# Altium PCB Main.PcbDoc
Units mil, origin at the board's own origin, x right, y up, seen from the top; angles counter-clockwise.
Board outline 670 x 1280 mil, 2 copper layers (Top Layer, Bottom Layer); 20 components, 14 nets, 71 pads, 10 vias.
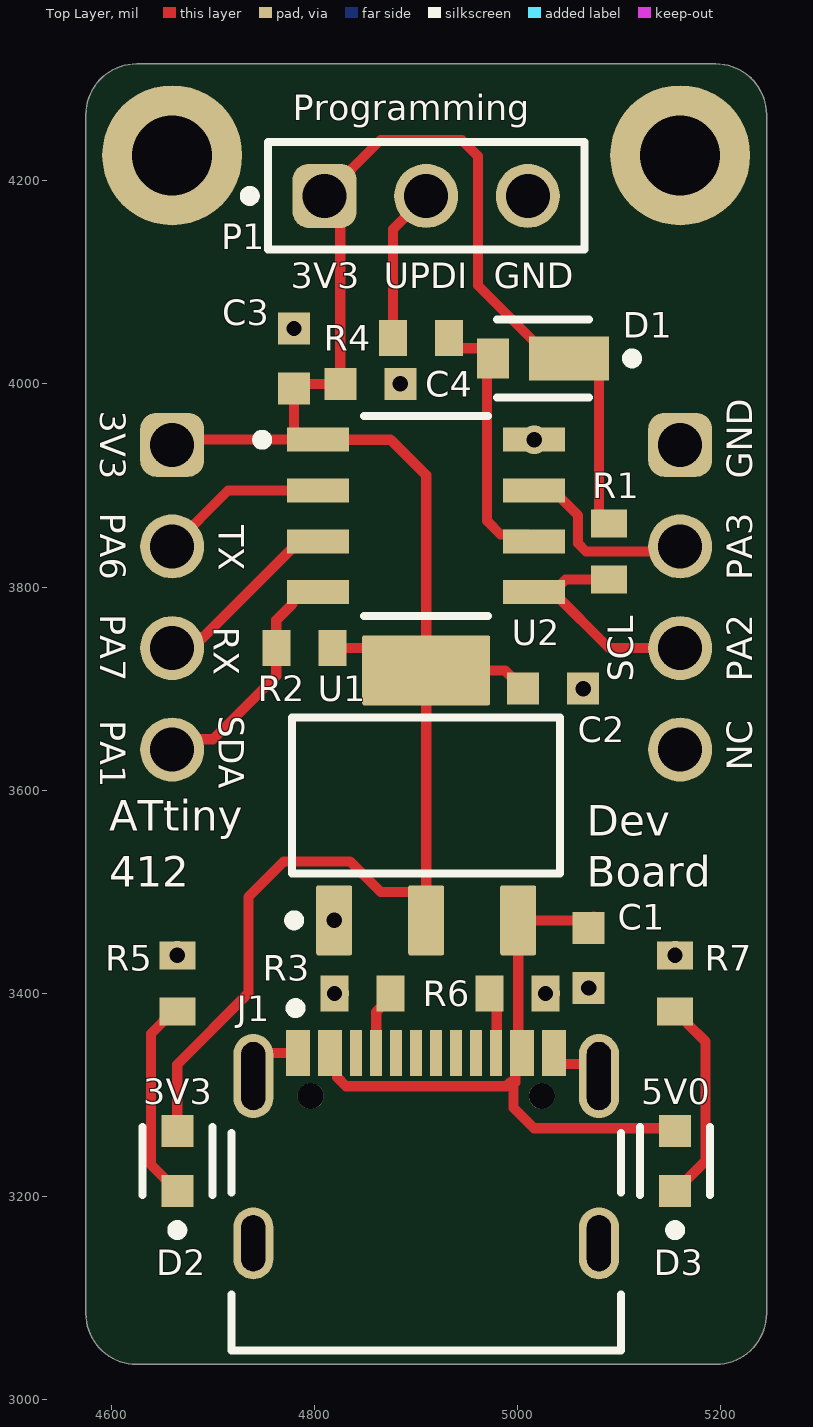
[diagram p0: Top Layer view]
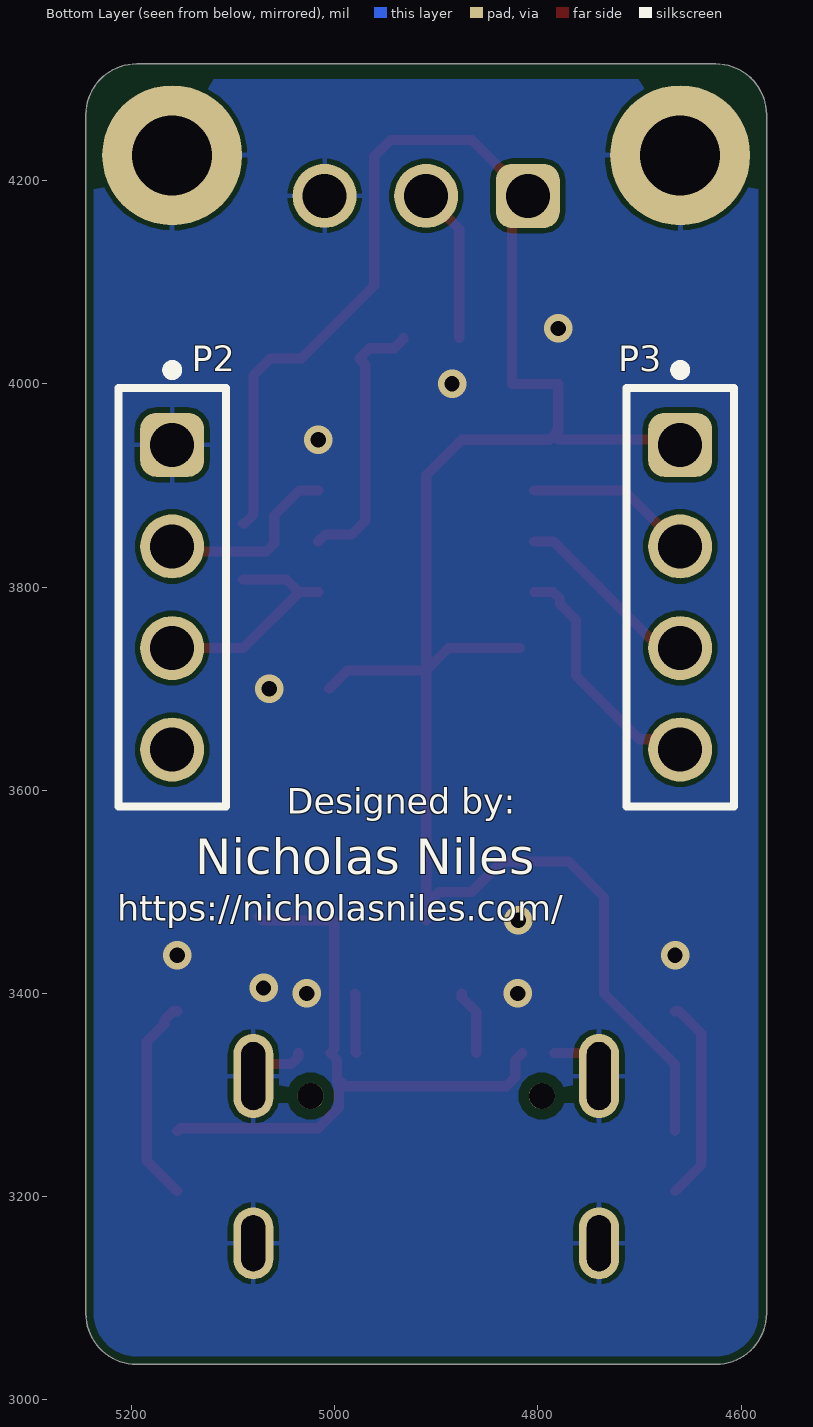
[diagram p1: Bottom Layer view, seen from below]
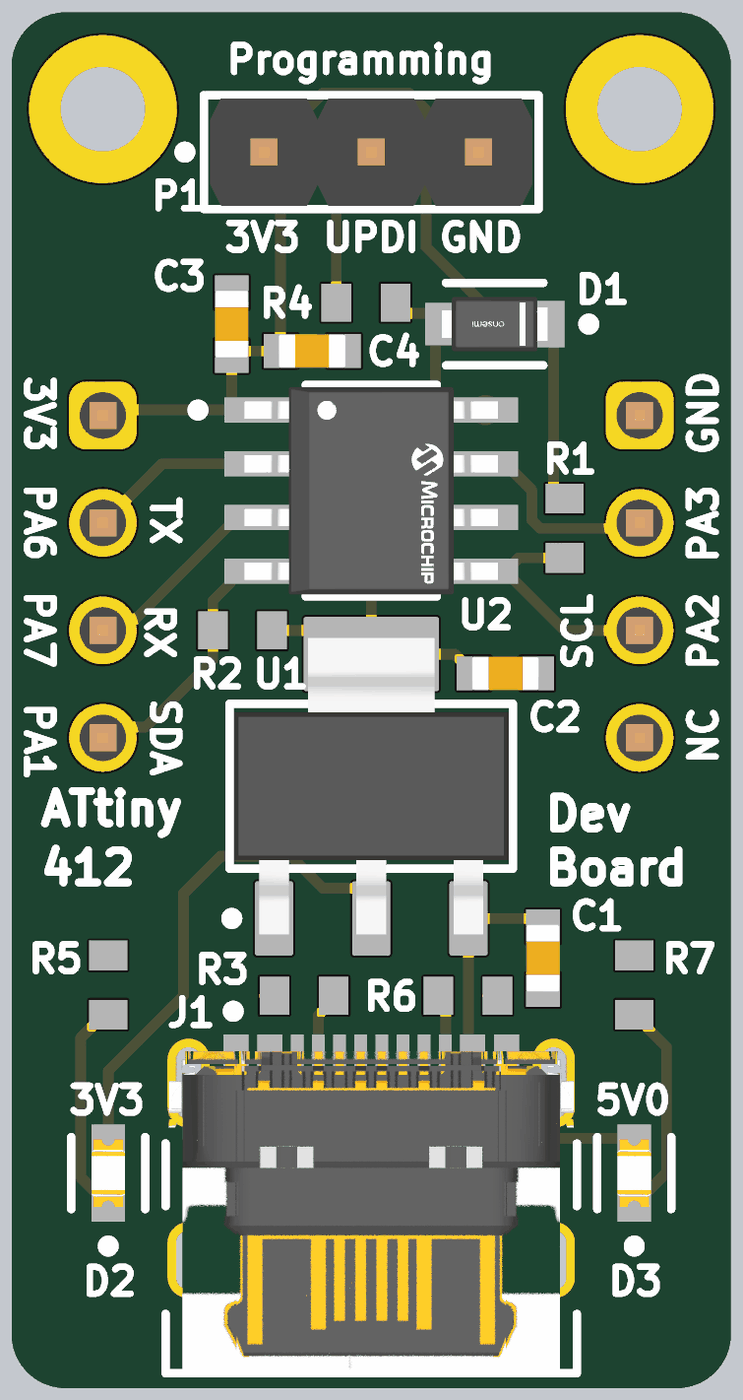
[diagram p2: 3D render of the assembled board from above, using the file's embedded part models]

## Layer stack, top to bottom
Top Solder: solder mask 0.4, Solder Resist, Dk 3.5
Top Layer: signal copper 1.4
Dielectric 1: dielectric 12.6, FR-4, Dk 4.8
Bottom Layer: signal copper 1.4
Bottom Solder: solder mask 0.4, Solder Resist, Dk 3.5

## Board outline
4575,3085 4575,4265 cw(c4625,4265) 4625,4315 5195,4315 cw(c5195,4265) 5245,4265 5245,3085 cw(c5195,3085) 5195,3035 4625,3035 cw(c4625,3085)

## Design rules (kind name [scope] priority, off if disabled: settings)
BoardOutlineClearance [All] p1: gap=7.87 ignorepadtopadclearanceinfootprint=FALSE
Clearance [All] p1: gap=5 ignorepadtopadclearanceinfootprint=TRUE except(10: Arc-Hole Track-Hole SMDPad-Hole THPad-Hole Via-Hole Fill-Hole Poly-Hole Region-Hole Text-Hole)
ComponentClearance [All] p1: gap=5 collisioncheckmode=3 verticalgap=5 showdistances=TRUE
DiffPairsRouting [All] p1: maxlimit=10 minlimit=5 mostfreqgap=5 toplayer_minwidth=5 toplayer_maxwidth=1000 toplayer_prefwidth=5 bottomlayer_minwidth=5 bottomlayer_maxwidth=1000 bottomlayer_prefwidth=5 maxuncoupledlength=500
Height [All] p1: minheight=0 maxheight=71497.94 prefheight=500
HoleSize [All] p1: absolutevalues=TRUE maxlimit=248.03 minlimit=11.81 maxpercent=80.000 minpercent=20.000
HoleToHoleClearance [All] p1: gap=10 allowstackedmicrovias=FALSE
MinimumAnnularRing [All] p1: minimumring=6
MinimumSolderMaskSliver [All] p1: minsoldermaskwidth=6
PlaneClearance [All] p1: clearance=5
PlaneConnect PlaneConnectPowerPads [InPadClass('PowerPads')] p1: planeconnectstyle=Direct reliefexpansion=20 reliefentries=4 reliefconductorwidth=10 reliefairgap=10
PlaneConnect [All] p2: pad.planeconnectstyle=Relief pad.reliefexpansion=11.81 pad.reliefentries=4 pad.reliefconductorwidth=5 pad.reliefairgap=5 via.planeconnectstyle=Direct via.reliefexpansion=11.81 via.reliefentries=4 via.reliefconductorwidth=5 via.reliefairgap=5
PolygonConnect PolygonConnectPowerPads [All vs (InPadClass('PowerPads'))] p1: connectstyle=Direct reliefconductorwidth=10 reliefentries=4 polygonreliefangle="90 Angle" airgapwidth=10
PolygonConnect [All] p2: thpad.connectstyle=Relief thpad.reliefconductorwidth=5 thpad.reliefentries=4 thpad.polygonreliefangle="90 Angle" thpad.airgapwidth=5 smdpad.connectstyle=Relief smdpad.reliefconductorwidth=5 smdpad.reliefentries=4 smdpad.polygonreliefangle="90 Angle" smdpad.airgapwidth=5 via.connectstyle=Direct via.reliefconductorwidth=5 via.reliefentries=4 via.polygonreliefangle="90 Angle" via.airgapwidth=5
RoutingVias [All] p1: holewidth=11.81 width=23.62 viastyle="Through Hole" minholewidth=11.81 minwidth=23.62 maxholewidth=23.62 maxwidth=259.84
SilkToSilkClearance [All] p1: silktosilkclearance=5
SilkToSolderMaskClearance [IsPad] p1: minsilkscreentomaskgap=5 clearancetoexposedcopper=TRUE
SolderMaskExpansion [All] p1: expansion=2 istentingtop=FALSE
SupplyNets "Schematic Supply Nets" [InNet('GND')] p1: voltage=0.000
SupplyNets "Schematic Supply Nets_3" [InNet('3V3')] p2: voltage=0.000
SupplyNets "Schematic Supply Nets_1" [InNet('5V0')] p3: voltage=0.000
UnRoutedNet [All] p1: checkbadconnections=TRUE
Width Width_10mil [All] p1: maxlimit=1000 minlimit=10 preferedwidth=10 minimp=50.000000 maximp=50.000000 favimp=50.000000
Width Width_6mil [All] p2: maxlimit=1000 minlimit=6 preferedwidth=6 minimp=50.000000 maximp=50.000000 favimp=50.000000
Width Power_20mil [All] p3: maxlimit=1000 minlimit=20 preferedwidth=20 minimp=50.000000 maximp=50.000000 favimp=50.000000
Width Power_12mil [All] p4: maxlimit=1000 minlimit=12 preferedwidth=12 minimp=50.000000 maximp=50.000000 favimp=50.000000
Width Width_5mil [All] p5: maxlimit=1000 minlimit=5 preferedwidth=5 minimp=50.000000 maximp=50.000000 favimp=50.000000
19 further rules are at their usual default settings.

## Components (designator, comment, footprint, x,y, rotation, side; value= is the part's Value field where it differs from the comment)
C1 "1uF" WCAP-CSGP_0603_L1.6W0.8H0.8_Reflow 5070,3435 r90 top
C2 "1uF" WCAP-CSGP_0603_L1.6W0.8H0.8_Reflow 5035,3700 r180 top
C3 "10uF" WCAP-CSGP_0603_L1.6W0.8H0.8_Reflow 4780,4025 r270 top
C4 "1uF" WCAP-CSGP_0603_L1.6W0.8H0.8_Reflow 4855,4000 r180 top
D1 "NRVBSS14HE" FP-477AD-MFG 5025,4025 r180 top
D2 "LTST-C190KGKT" FP-LTST-C190KGKT-MFG 4665,3235 r90 top
D3 "LTST-C190KGKT" FP-LTST-C190KGKT-MFG 5155,3235 r90 top
J1 "USB4105-GF-A" FP-USB4105-GF-A-MFG 4910,3200 r0 top locked
P1 "61300311121" 61300311121 4910,4185 r0 top locked
P2 "61300411121" 61300411121 5160,3790 r270 bottom locked
P3 "61300411121" 61300411121 4660,3790 r270 bottom locked
R1 "4.7K" RESC1608X55X25NL10T15 5090,3835 r270 top
R2 "4.7K" RESC1608X55X25NL10T15 4790,3740 r180 top
R3 "5.1k" RESC1608X55X25NL10T15 4847.44,3400 r0 top
R4 "1k" RESC1608X55X25NL10T15 4905,4045 r0 top
R5 "1kΩ" RESC1608X55X25NL10T15 4665,3410 r270 top
R6 "5.1k" RESC1608X55X25NL10T15 5000,3400 r180 top
R7 "2.2k" RESC1608X55X25NL10T15 5155,3410 r270 top
U1 "TLV1117LV33DCYR" DCY0004A_N 4910,3595 r90 top locked
U2 "ATTINY412-SSNR" FP-C04-057-SN-MFG 4910,3870 r0 top locked

## Footprints (in the part's own frame and the unit in brackets; to place one, negate y for a bottom-side part, rotate by r counter-clockwise, add the part's x,y. Pads: shape width x height; smd on the part's side, far side on the other; paste and mask are expansions set on the pad)
61300311121 [mm] "Pin Header, pitch 2.54 mm, THT, Vertical, single row, 3p"
  rrect50% 1.6x1.6 hole 1.1: 1(-2.54,0)
  round 1.6 hole 1.1: 2(0,0) 3(2.54,0)
  silkscreen extent -4.53,-1.35 3.96,1.35, body extent -3.81,-1.27 3.81,1.27, height 8.57
61300411121 [mm] "Pin Header, pitch 2.54 mm, THT, Vertical, single row, 4p"
  rrect50% 1.6x1.6 hole 1.1: 1(-3.81,0)
  round 1.6 hole 1.1: 2(-1.27,0) 3(1.27,0) 4(3.81,0)
  silkscreen extent -5.8,-1.35 5.23,1.35, body extent -5.08,-1.27 5.08,1.27, height 8.57
DCY0004A_N [mm] "SOT223, 4-Leads, Body 6.7x3.7mm, Pitch 2.3mm, IPC Medium Density"
  rrect11% 1.75x0.9 smd: 1(-3.125,2.3) 2(-3.125,0) 3(-3.125,-2.3)
  rrect6% 1.75x3.2 smd: 4(3.125,0)
  silkscreen extent -3.25,-3.35 1.95,3.42, body extent -3.5,-3.25 3.5,3.25, height 1.62
FP-477AD-MFG [mm]
  rect 2x1.1 smd paste+0 mask+0: 1(-0.65,0)
  rect 0.8x1 smd paste+0 mask+0: 2(1.25,0)
  silkscreen extent -2.35,-0.97 1.15,0.97, body extent -1.75,-0.8 1.75,0.8, height 0.25
FP-C04-057-SN-MFG [mm]
  rect 1.55x0.6 smd paste+0 mask+0: 1(-2.7,1.905) 2(-2.7,0.635) 3(-2.7,-0.635) 4(-2.7,-1.905) 5(2.7,-1.905) 6(2.7,-0.635) 7(2.7,0.635) 8(2.7,1.905)
  silkscreen extent -4.22,-2.5 1.55,2.5, body extent -3.57,-2.75 3.57,2.75, height 0.25
FP-LTST-C190KGKT-MFG [mm]
  rect 0.8x0.8 smd paste+0 mask+0: 1(-0.75,0) 2(0.75,0)
  silkscreen extent -1.85,-0.87 0.85,0.87, body extent -1.25,-0.55 1.25,0.55, height 0.25
FP-USB4105-GF-A-MFG [mm]
  rrect100% 1x2.1 hole 1.7 slot 0.6 at 0 deg paste-2539.97 mask+0: 1(-4.32,3.015) 2(4.32,3.015)
  rrect100% 1x1.8 hole 1.4 slot 0.6 at 0 deg paste-2539.97 mask+0: 3(-4.32,-1.165) 4(4.32,-1.165)
  rect 0.6x1.15 smd paste+0 mask+0: A1-B12(-3.2,3.59) A4-B9(-2.4,3.59) B1-A12(3.2,3.59) B4-A9(2.4,3.59)
  rect 0.3x1.15 smd paste+0 mask+0: A5(-1.25,3.59) A6(-0.25,3.59) A7(0.25,3.59) A8(1.25,3.59) B5(1.75,3.59) B6(0.75,3.59) B7(-0.75,3.59) B8(-1.75,3.59)
  round 0.65 hole 0.65 unplated paste-2539.97 mask+0: ""(-2.89,2.515) ""(2.89,2.515)
  silkscreen extent -4.86,-3.84 4.86,4.84, body extent -4.96,-3.94 4.96,4.27, height 0.25
RESC1608X55X25NL10T15 [mm] "Chip Resistor, 2-Leads, Body 1.60x0.80mm, IPC Medium Density"
  rect 0.7x0.9 smd: 1(-0.7,0) 2(0.7,0)
  body extent -0.85,-0.45 0.85,0.45, height 0.55
WCAP-CSGP_0603_L1.6W0.8H0.8_Reflow [mm] "Ceramic Capacitors, body 1.6x0.8mm"
  rect 0.8x0.8 smd: 1(-0.75,0) 2(0.75,0)
  body extent -0.8,-0.4 0.8,0.4, height 0.8

## Part data
C1 C2 C3 C4: library part CMP-207839-000060-3, "10V tolerance"
D1: library part CMP-00278-93203856-2, "NRVBSS14HE Rectifier Diode, Schottky, 1 Phase, 1 Element, 1A, 40V V(RRM), Silicon", Capacitance=55pF, Forward Current=1A, Manufacturer Lifecycle Status=ACTIVE, Max Forward Surge Current (Ifsm)=25A, Max Junction Temperature (Tj)=150°C, Max Repetitive Reverse Voltage (Vrrm)=40V, Min Operating Temperature=-55°C, Peak Reverse Current=5µA, Height=750µm, Lifecycle Status=Production, Max Operating Temperature=150°C, NexarPartId=93203856, Reverse Voltage=40V, RoHS=Compliant
D2 D3: library part CMP-2000-05197-2, "LED GREEN CLEAR CHIP SMD", Case Code (Imperial)=0603, Case Code (Metric)=1608, Color=Green, Forward Current=30mA, Forward Voltage=2V, Lens Color=Colorless, Max Operating Temperature=85°C, Min Operating Temperature=-55°C, Package Quantity=1, Power Dissipation=75mW, Reverse Voltage=5V, Test Current=20mA, Case/Package=0603, Depth=0.8mm, Dominant Wavelength=571nm, Height=0.8mm, Illumination Color=Green, Lead Free="Lead Free", Length=1.6mm, Lens Style=Diffused, Lens Transparency=Clear, Luminous Intensity=35mcd, Mount="Surface Mount", Number of Elements=1, Number of LEDs=1, Number of Pins=2, Packaging="Tape and Reel", Power Rating=75mW, Radiation Hardening=No, Viewing Angle=130°, Wavelength=574nm, Width=0.8mm
J1: library part CMP-245163-000001-1, "CONN RCPT USB2.0 TYPEC 5A", Current Rating=5/6.25/1.25/0.25A, Manufacturer=GCT, Package=0, Temperature="-40°C to +85°C", Temperature Range High=+85°C, Temperature Range Low=-40°C, Voltage Rating=20V, Automotive=No, Category=Conn, ComponentLink2Description=Datasheet, ComponentLink2URL=https://gct.co/files/drawings/usb4105.pdf, Conn Orientation="Right Angle", Contact Material=Gold,Nickel, Device Class L1=Connectors, Device Class L2="USB Connectors", Device Class L3=unset, Digikey Description="CONN RCPT USB2.0 TYPEC 5A", Height=3.46mm, Is Female=yes, Lead Free=Yes, Manufacturer Part Number=USB4105-GF-A, Number of Contacts=16, Octopart=https://octopart.com/usb4105-gf-a-gct-106627878, RoHS=TRUE, Usb Standard="USB 2.0"
P1: library part CMP-1502-01062-3, Color=Black, Contact Resistance=20mΩ, Current Rating=3A, Max Operating Temperature=105°C, Min Operating Temperature=-40°C, Operating Supply Voltage=250V, Connector Type="Male Pin", Contact Material=Copper, Contact Mating Length=5.9944mm, Contact Plating=Gold, Gender=Male, Height=8.94mm, Lead Free="Lead Free", Lead Pitch=2.54mm, Mount="Through Hole", NexarPartId=32855521, Number of Contacts=3, Number of Pins=3, Number of Positions=3, Number of Rows=1, Orientation=Vertical, Packaging=Bulk, Pitch=2.54mm, REACH SVHC=Unknown, RoHS=Compliant, Termination=Solder, Voltage Rating=250V
P2 P3: library part CMP-1502-01064-3, Color=Black, Contact Resistance=20mΩ, Current Rating=3A, Max Operating Temperature=105°C, Min Operating Temperature=-40°C, Operating Supply Voltage=250V, Connector Type="Male Pin", Contact Material=Copper, Contact Mating Length=5.9944mm, Contact Plating=Gold, Gender=Male, Height=8.89mm, Lead Free="Lead Free", Lead Pitch=2.54mm, Mount="Through Hole", NexarPartId=32855522, Number of Contacts=4, Number of Pins=4, Number of Positions=4, Number of Rows=1, Orientation=Vertical, Packaging=Bulk, Pitch=2.54mm, REACH SVHC=Unknown, RoHS=Compliant, Termination=Solder, Voltage Rating=250V
R1 R2 R3 R4 R5 R6 R7: library part CMP-2000-04186-1
U1: library part CMP-0395-00503-2, "Single Output LDO, 1 A, Fixed 3.3 V Output, 2 to 5.5 V Input, 4-pin SOT-223 (DCY), -40 to 125 degC, Green (RoHS & no Sb/Br)", Manufacturer="Texas Instruments", Accuracy(%)=2, Code_JEDEC=TO-261, ComponentLink1Description="Manufacturer URL", ComponentLink1URL=http://www.ti.com/, ComponentLink2Description=Datasheet, ComponentLink2URL=http://www.ti.com/general/docs/lit/getliterature.tsp?genericPartNumber=TLV1117LV33&fileType=pdf, ComponentLink3Description="Package Specification", ComponentLink3URL=http://www.ti.com/litv/pdf/mpds094a, DatasheetVersion=SBVS160A, Eco-Plan="Green (RoHS & no Sb/Br)", Fixed Output Options(V)=3.3, Iout(Max)(A)=1, Iq(Typ)(mA)=0.05, Mounting Technology="Surface Mount", PackageDescription="4-Pin Plastic Small Outline, Body 3.5 x 6.5 mm, Pitch 2.3 mm", PackageReference=DCY0004A, PackageVersion=4202506/B, PartNumber=TLV1117LV33DCYR, SubFamily="Single Channel LDO", Vdo(Typ)(mV)=1200, Vin(Max)(V)=5.5, Vin(Min)(V)=2, Vout Adj(Max)(V)=3.3, Vout Adj(Min)(V)=3.3
U2: library part CMP-06276-000158-1, "IC MCU 8BIT 4KB FLASH 8SOIC", Case/Package=SOIC, Frequency=20MHz, Max Operating Temperature=105°C, Min Operating Temperature=-40°C, Core Architecture=AVR, Interface=I2C, Memory Size=4KB, Memory Type=FLASH, Number Of I/Os=6, Number of Pins=8, Oscillator Type=Internal, Packaging="Cut Tape", Peripherals="Brown-out Detect/Reset", RoHS Compliant=Yes

## Free pads (board coordinates)
  round 137.79 hole 78.74: 7(4660,4225) 7(5160,4225)

## Via types
v1: diameter 28, hole 15, Top Layer to Bottom Layer, tented both sides, 10 vias

## Nets (pads, with @x,y where several pads share a name; then routed paths per layer and width w, separated by ;. In a path a pad name is that pad's centre, name@x,y a point inside that pad or via, vN(x,y) a via of type N, cw(c..) or ccw(c..) an arc to the next point about the centre after c; other vN are vias at no path point)
3V3: C2.2 C3.2 C4.2 D1.1 D2.2 P1.1 P3.1 R1.1 R2.1 U1.2 U1.4 U2.1 | length 2278.5
  Top Layer w10: P3.1 4665.34,3945.34 4780,3945.34 U2.1@4780,3951.81 ; D2.2 4665,3330.14 4735,3400.14 4735,3495 4770,3530 4835,3530 4865,3500 4897.28,3500 U1.2@4910,3487.28 ; C3.2 4780,3955.19 4781.74,3953.44 4781.74,3951.81 4788.55,3945 U2.1 4875,3945 4910,3910 U1.4 ; C3.2@4780,4000 C4.2 4825.47,4169.53 P1.1 4865,4240 4945,4240 4961.04,4223.96 4961.04,4096.83 5032.87,4025 5063.35,4025 5080,4008.35 5080,3871.34 5088.78,3862.56 R1.1 ; R2.1 4888.03,3740 U1.4 ; U1.2 U1.2@4910,3487.28 ; C2.2 4987.44,3718.03 U1.4 ; U1.2@4910,3487.28 U1.4
5V0: C1.2 D3.2 J1.A4-B9 J1.B4-A9 U1.3 | length 639.3
  Top Layer w10: J1.A4-B9 4822.32,3334.53 4822.32,3317.43 4831.05,3308.7 4988.95,3308.7 4992.83,3312.58 4995.98,3312.58 4995.98,3287.5 5016.12,3267.36 5152.17,3267.36 D3.2 ; 4997.68,3312.22 4997.68,3317.43 4997.68,3334.53 J1.B4-A9 5000.55,3345.28 U1.3 5004.49,3471.97 5071.5,3471.97 C1.2@5075,3475.47
GND: C1.1 C2.1 C3.1 C4.1 J1.1 J1.2 J1.3 J1.4 J1.A1-B12 J1.B1-A12 P1.3 P2.1 pad.7 R3.1 R5.1 R6.1 R7.1 U1.1 U2.8 | length 114.6
  Top Layer w10: J1.1 4739.92,3327.77 4753.49,3341.34 J1.A1-B12 ; J1.B1-A12 5035.98,3337.32 5042.8,3330.51 5068.27,3330.51 J1.2
  other v1: 4819.88,3400 5027.56,3400 5070,3405.47 4665,3437.56 5155,3437.56 4819.45,3471.97 5064.53,3700 5016.3,3945 4884.53,4000 4780,4054.53
NetD2_1: D2.1 R5.2 | length 200.6
  Top Layer w10: D2.1 4639.25,3231.22 4639.25,3360.63 4661.06,3382.44 R5.2
NetD3_1: D3.1 R7.2 | length 204.1
  Top Layer w10: D3.1 5185,3235.47 5185,3352.44 5167.72,3369.72 5167.72,3373.66 5158.94,3382.44 R7.2
NetJ1_A5: J1.A5 R3.2 | length 64.5
  Top Layer w10: J1.A5 4860.79,3381.85 4875,3396.06 R3.2
NetJ1_B5: J1.B5 R6.2 | length 59.1
  Top Layer w10: J1.B5 4979.45,3341.89 4979.45,3399.45 R6.2@4980,3400
PA1//SDA: P3.4 R2.2 U2.4 | length 243.1
  Top Layer w10: P3.4 4670.14,3650.14 4700.14,3650.14 4762.44,3712.44 4762.44,3767.44 4778.19,3783.19 4778.19,3788.19 4785,3795 U2.4
PA2//SCL: P2.3 R1.2 U2.5 | length 226.6
  Top Layer w10: U2.5 U2.5@5035,3795 ; R1.2 5047.44,3807.44 U2.5@5035,3795 ; P2.3 5090,3740 U2.5@5035,3795
PA3: P2.2 U2.7 | length 186.8
  Top Layer w10: U2.7 5035,3895 5059.55,3870.45 5059.55,3842.81 5067.35,3835 5155,3835 P2.2
PA6//TX: P3.2 U2.2 | length 166.5
  Top Layer w10: P3.2 4715,3895 U2.2
PA7//RX: P3.3 U2.3 | length 187.2
  Top Layer w10: P3.3 4670.14,3750.14 4690.14,3750.14 4785,3845 U2.3
UPDI: D1.2 R4.2 U2.6 | length 269.2
  Top Layer w10: R4.2 4932.56,4043.78 4941.34,4035 4965.79,4035 D1.2 4970,4019.21 4970,3865 4983.19,3851.81 5009.49,3851.81 U2.6
UPDI_PRE: P1.2 R4.1 | length 153.5
  Top Layer w10: R4.1 4877.44,4152.44 P1.2
pads on no net: J1. J1.A6 J1.A7 J1.A8 J1.B6 J1.B7 J1.B8 P2.4

## Polygon pours and split planes (outlines as drawn)
GND on Bottom Layer "GND_L02_P000" (solid, pour order 0): 5240,3035 4580,3035 4580,4300 5240,4300

## Silkscreen, mask and mechanical layers (free items; w line width, h text height)
Top Overlay:
  text "Programming" at 4778.79,4259.33 h25
  text "3V3" at 4776.68,4094.01 h25
  text "UPDI" at 4868.35,4094.01 h25
  text "GND" at 4976.68,4094.01 h25
  text "3V3" at 4589.01,3973.32 h25 r270
  text "GND" at 5230.99,3906.68 h25 r90
  text "PA6" at 4589.01,3873.32 h25 r270
  text "TX" at 4706,3860.83 h25 r270
  text "PA3" at 5230.99,3806.68 h25 r90
  text "PA7" at 4589.01,3773.32 h25 r270
  text "RX" at 4701,3760.83 h25 r270
  text "SCL" at 5114,3706.68 h25 r90
  text "PA2" at 5230.99,3706.68 h25 r90
  text "SDA" at 4706,3673.32 h25 r270
  text "PA1" at 4589.01,3669.16 h25 r270
  text "NC" at 5230.99,3619.17 h25 r90
  text "ATtiny" at 4598,3560 h30
  text "Dev" at 5068,3555 h30
  text "412" at 4598,3505 h30
  text "Board" at 5068,3505 h30
  text "3V3" at 4631.68,3291 h25
  text "5V0" at 5121.68,3291 h25
Bottom Overlay:
  text "Designed by:" at 5047.46,3576.67 h25
  text "Nicholas Niles" at 5137.43,3517.51 h35
  text "https://nicholasniles.com/" at 5214.07,3471.67 h25
Mechanical 1:
  the board outline again, w10